# Altium PCB Glucometer-I.C.- Full V1.PcbDoc
Units mm, origin at the board's own origin, x right, y up, seen from the top; angles counter-clockwise.
Board outline 53.55 x 41.75 mm, 2 copper layers (Top Layer, Bottom Layer); 27 components, 32 nets, 132 pads, 21 vias.
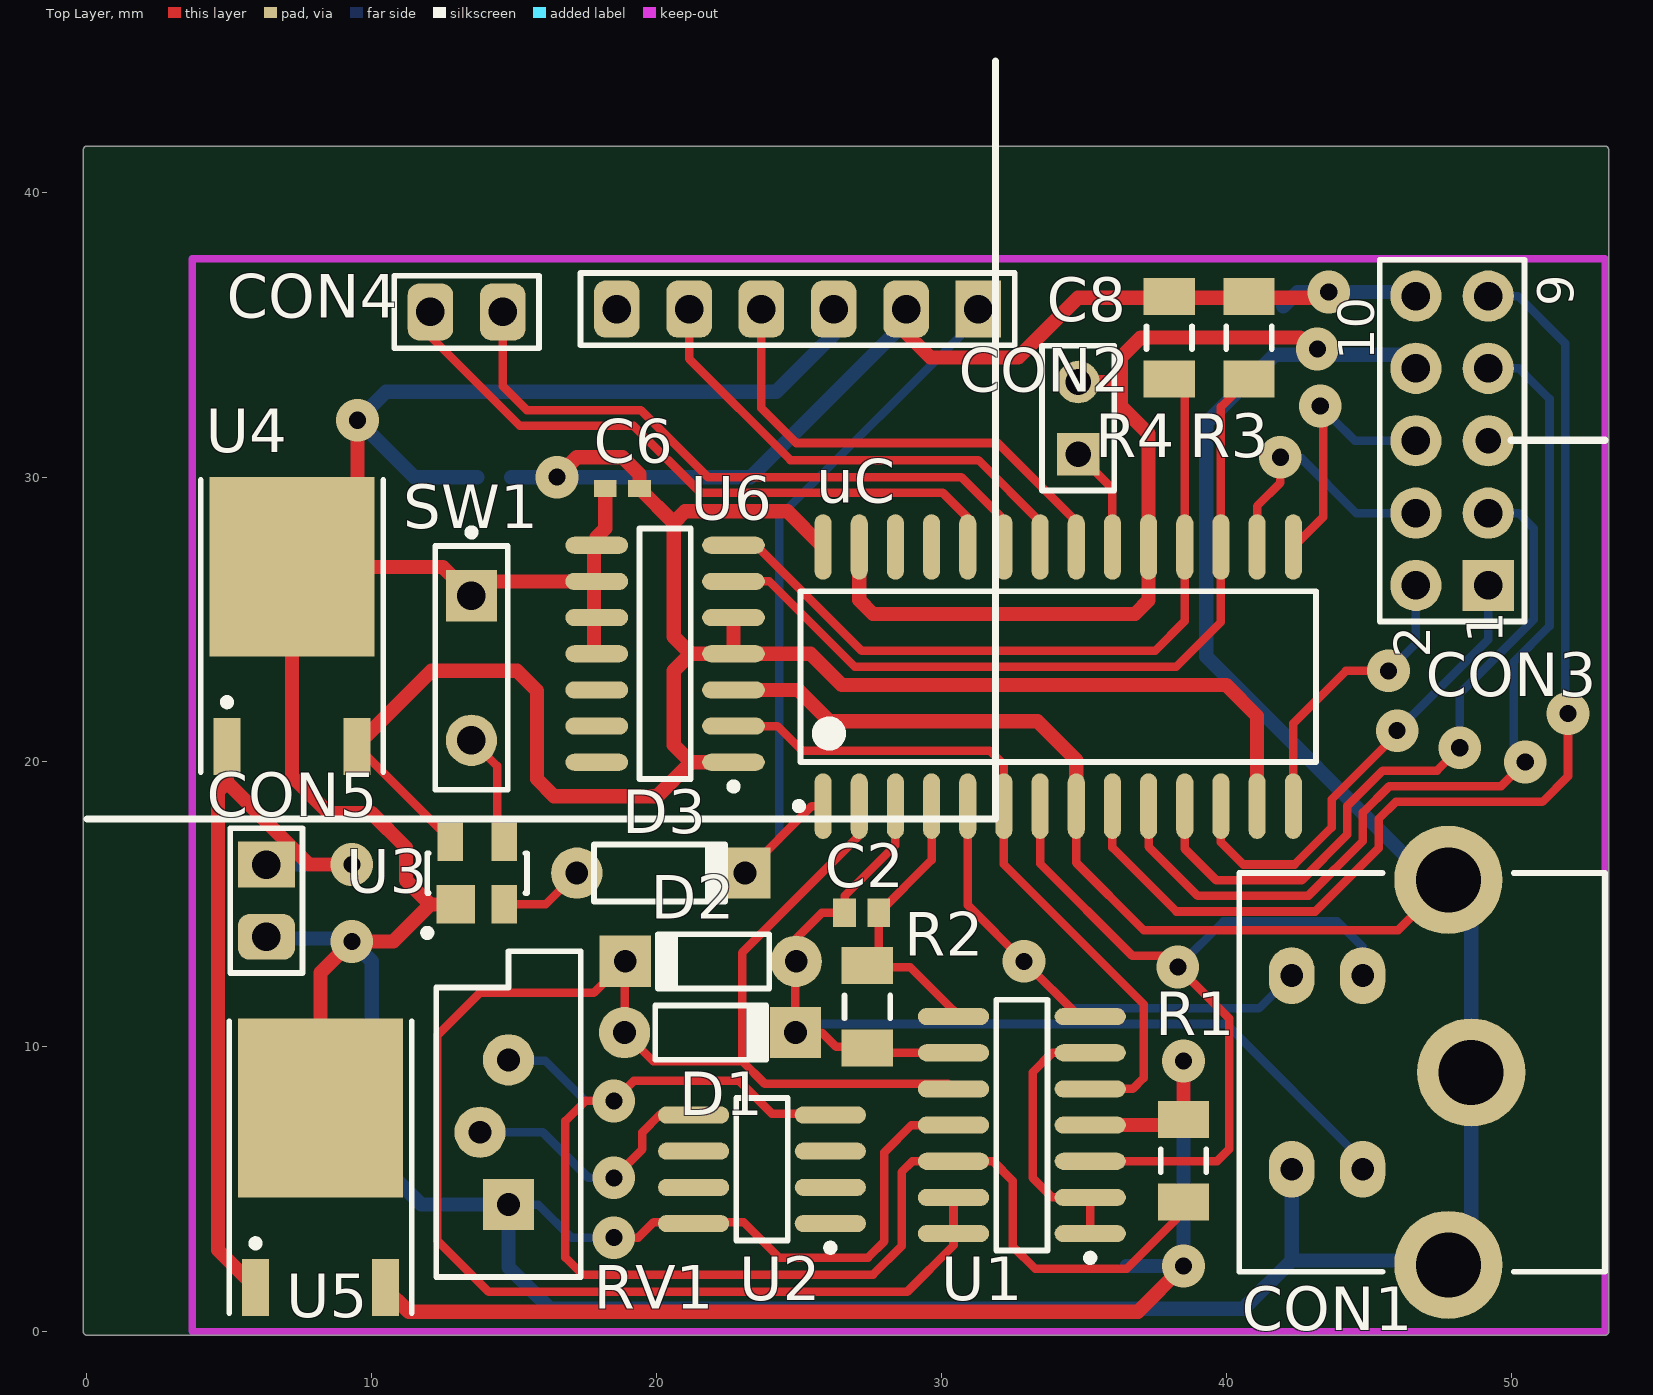
[diagram p0: Top Layer view]
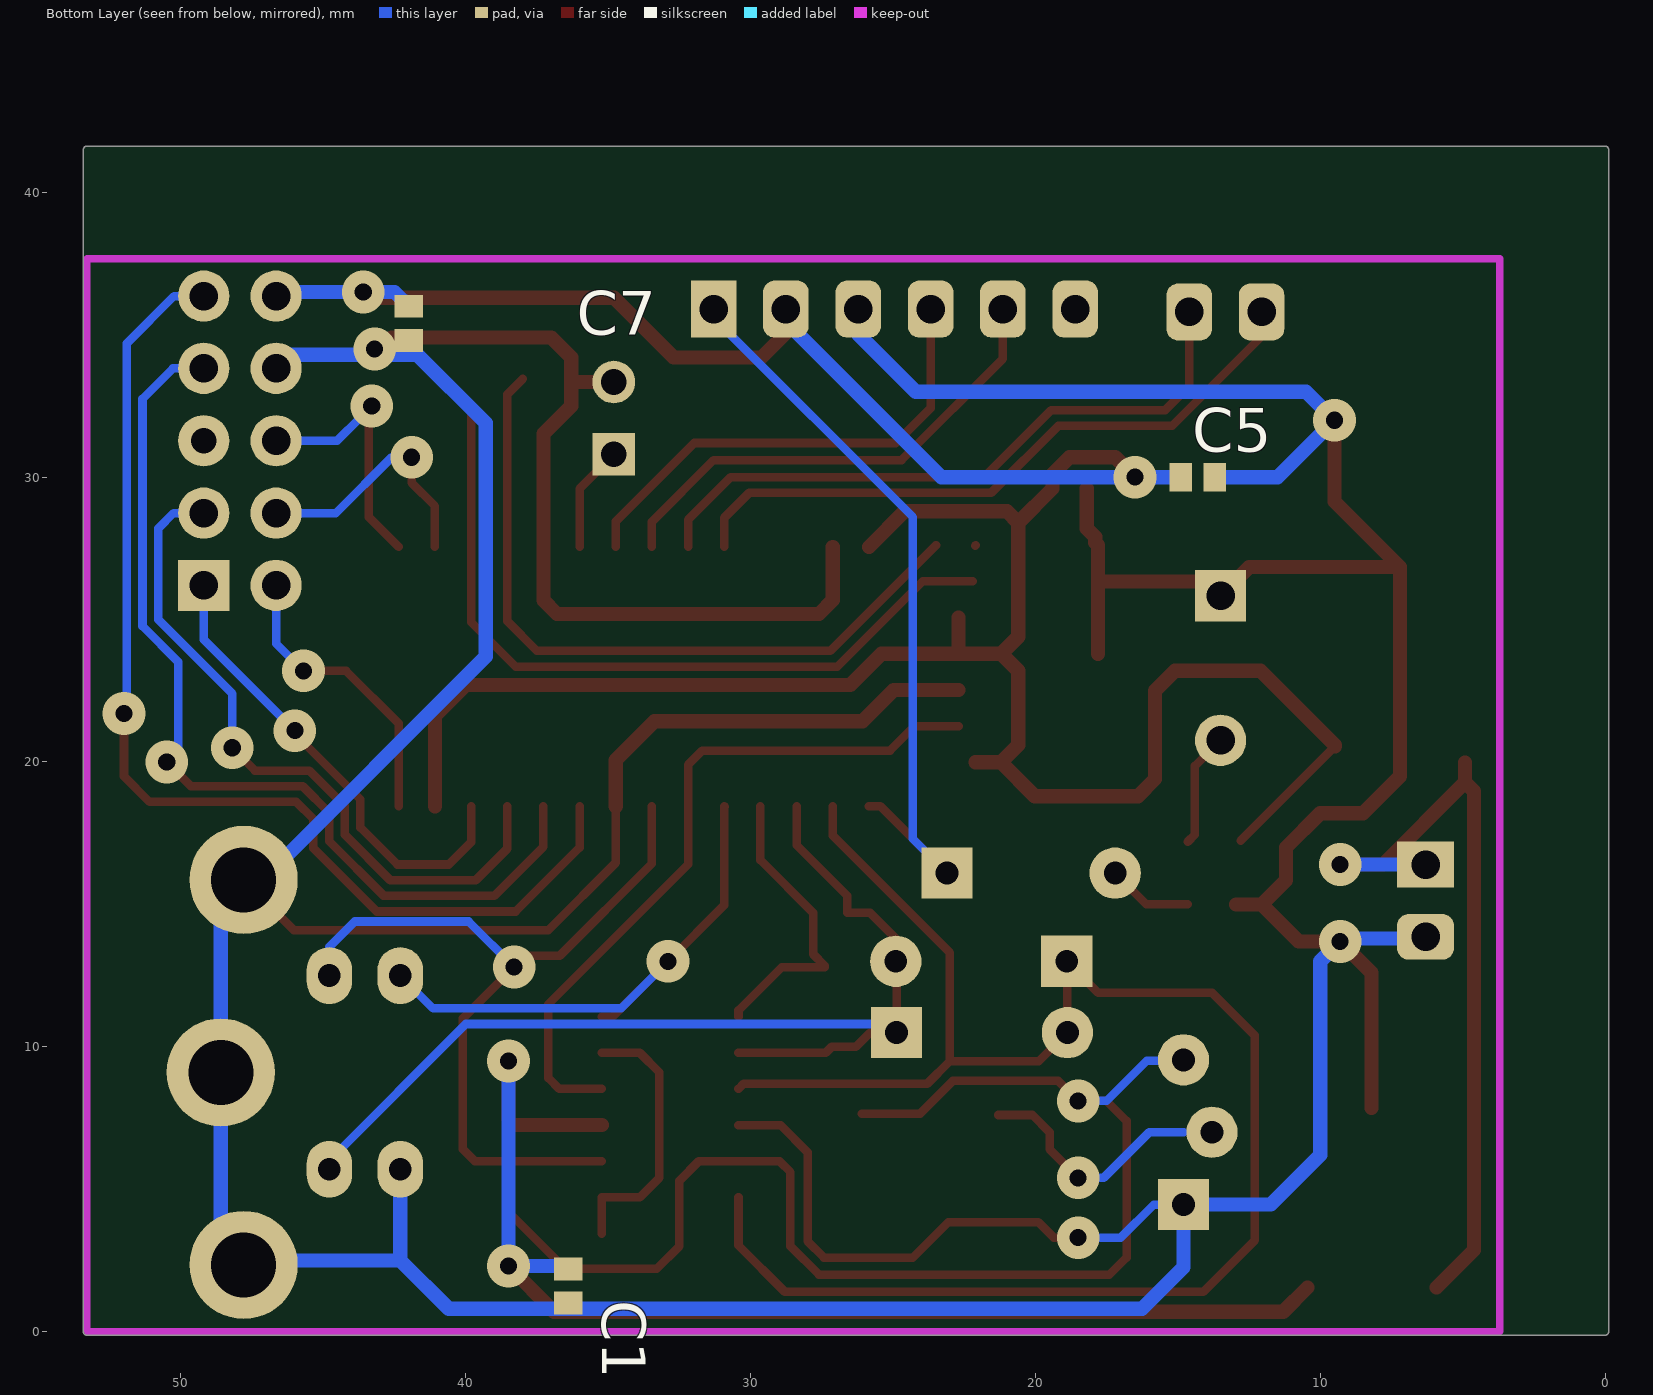
[diagram p1: Bottom Layer view, seen from below]

## Layer stack, top to bottom
Top Layer: signal copper 0.0356
Dielectric: dielectric 0.32, FR-4, Dk 4.8
Bottom Layer: signal copper 0.0356

## Board outline
-0.127,0 ccw(c0,0) 0,-0.127 53.3,-0.127 ccw(c53.3,0) 53.427,0 53.427,41.5 ccw(c53.3,41.5) 53.3,41.627 0,41.627 ccw(c0,41.5) -0.127,41.5

## Design rules (kind name [scope] priority, off if disabled: settings)
AssemblyTestPointUsage AssemblyTestPointUsage_1 [All] p2:
AssemblyTestpoint AssemblyTestpoint_1 [All] p2: testpointundercomponent=TRUE minsize=1.016 maxsize=2.54 preferedsize=1.524 minholesize=0 maxholesize=1.016 preferedholesize=0.813 testpointgrid=0.025 usegrid=TRUE gridtolerance=0 allowsidetop=TRUE allowsidebottom=TRUE
Clearance [All] p1: gap=0.25
ComponentClearance ComponentClearance_1 [All] p2: gap=0.254 collisioncheckmode=3 verticalgap=0.254 showdistances=FALSE
DiffPairsRouting DiffPairsRouting_1 [All] p2: maxlimit=0.254 minlimit=0.254 mostfreqgap=0.254 maxuncoupledlength=12.7
FabricationTestPointUsage TestPointUsage [All] p2: valid=0 allowmultiple=FALSE
FabricationTestpoint Testpoint [All] p2: side=3 testpointundercomponent=TRUE minsize=1.016 maxsize=2.54 preferedsize=1.524 minholesize=0 maxholesize=1.016 preferedholesize=0.813 testpointgrid=0.025 allowsidetop=TRUE allowsidebottom=TRUE usegrid=TRUE gridtolerance=0
FanoutControl Fanout_LCC [IsLCC] p1: bgadir=Out bgaviamode=Centered fanoutstyle=Auto fanoutdirection=Alternating viagrid=0.025 // Fanout_LCC (Default Rule)
FanoutControl Fanout_BGA [IsBGA] p2: bgadir=Out bgaviamode=Centered fanoutstyle=Auto fanoutdirection=Alternating viagrid=0.025 // Fanout_BGA (Default Rule)
FanoutControl Fanout_Default [All] p4: bgadir=Out bgaviamode=Centered fanoutstyle=Auto fanoutdirection=Alternating viagrid=0.025 // Fanout_Default (Default Rule)
FanoutControl Fanout_Small [(CompPinCount < 5)] p5: bgadir=Out bgaviamode=Centered fanoutstyle=Auto fanoutdirection=OutThenIn viagrid=0.025 // Fanout_Small (Default Rule)
FanoutControl Fanout_BGA_1 [IsBGA] p6: bgadir=Out bgaviamode=Centered fanoutstyle=Auto fanoutdirection=Alternating viagrid=0.025 // Fanout_BGA (Default Rule)
FanoutControl Fanout_LCC_1 [IsLCC] p7: bgadir=Out bgaviamode=Centered fanoutstyle=Auto fanoutdirection=Alternating viagrid=0.025 // Fanout_LCC (Default Rule)
FanoutControl Fanout_SOIC_1 [IsSOIC] p8: bgadir=Out bgaviamode=Centered fanoutstyle=Auto fanoutdirection=Alternating viagrid=0.025 // Fanout_SOIC (Default Rule)
FanoutControl Fanout_Small_1 [(CompPinCount < 5)] p9: bgadir=Out bgaviamode=Centered fanoutstyle=Auto fanoutdirection=OutThenIn viagrid=0.025 // Fanout_Small (Default Rule)
FanoutControl Fanout_Default_1 [All] p10: bgadir=Out bgaviamode=Centered fanoutstyle=Auto fanoutdirection=Alternating viagrid=0.025 // Fanout_Default (Default Rule)
Height Height_1 [All] p2: minheight=0 maxheight=25.4 prefheight=12.7
HoleSize [All] p1: absolutevalues=TRUE maxlimit=5 minlimit=0.025 maxpercent=80.000 minpercent=20.000
HoleSize HoleSize_1 [All] p2: absolutevalues=TRUE maxlimit=5 minlimit=0.025 maxpercent=80.000 minpercent=20.000
HoleToHoleClearance HoleToHoleClearance_1 [All] p2: gap=0.254 allowstackedmicrovias=TRUE
LayerPairs LayerPairs_1 [All] p2: enforce=TRUE
MinimumSolderMaskSliver MinimumSolderMaskSliver_1 [All] p2: minsoldermaskwidth=0.254
NetAntennae NetAntennae_1 [All] p2: netantennaetolerance=0
PasteMaskExpansion PasteMaskExpansion_1 [All] p2: expansion=0
PlaneClearance PlaneClearance_1 [All] p2: clearance=0.508
PolygonConnect [All] p1: connectstyle=Relief reliefconductorwidth=0.254 reliefentries=4 polygonreliefangle="90 Angle" airgapwidth=0.254
PolygonConnect PolygonConnect_1 [All] p2: connectstyle=Relief reliefconductorwidth=0.254 reliefentries=4 polygonreliefangle="90 Angle" airgapwidth=0.254
RoutingPriority RoutingPriority_1 [All] p2: routingpriority=0
RoutingTopology RoutingTopology_1 [All] p2: topology=Shortest
RoutingVias [All] p1: holewidth=0.8 width=1.5 viastyle="Through Hole" minholewidth=0.7 minwidth=1 maxholewidth=1 maxwidth=2
ShortCircuit ShortCircuit_1 [All] p2: allowed=FALSE
SilkToSilkClearance SilkToSilkClearance_1 [All] p2: silktosilkclearance=0.254
SilkToSolderMaskClearance SilkscreenOverComponentPads [IsPad] p2: minsilkscreentomaskgap=0.254 clearancetoexposedcopper=TRUE
SolderMaskExpansion [All] p1: expansion=0.102
SolderMaskExpansion SolderMaskExpansion_1 [All] p2: expansion=0.102
UnRoutedNet UnRoutedNet_1 [All] p2:
Width [All] p1: maxlimit=5 minlimit=0.25 preferedwidth=0.3 minimp=50.000000 maximp=50.000000 favimp=50.000000
23 further rules are at their usual default settings.

## Components (designator, comment, footprint, x,y, rotation, side; value= is the part's Value field where it differs from the comment)
C1 "Cap2" CAPC1005N#1 36.4,1.6 r270 bottom
C2 "Cap2" CAPC1005N#1 27.2,14.7 r0 top
C5 "Cap" CAPC1005N#1 14.3,30 r0 bottom
C6 "Cap" CAPC1005N#2 18.8,29.6 r0 top
C7 "Cap" CAPC1005N#1 42,35.4 r90 bottom
C8 "Cap Pol1" HDR1X2#1 34.8,30.8 r90 top
CON1 "" CDIN2.6-3H4A 53.3,9.1 r180 top
CON2 "Header 6" HDR1X6 31.3,35.9 r180 top
CON3 "Header 5X2" HDR2X5 49.2,26.2 r90 top
CON4 "Header 2" HDR1X2#2 14.6,35.8 r180 top
CON5 "Header 2" HDR1X2#3 6.3,16.4 r270 top
D1 "1N4148" DO-35#1 21.9,10.5 r0 top
D2 "1N4148" DO-35#2 22,13 r180 top
D3 "1N4148" DO-35#3 20.1,16.1 r0 top
R1 "Res1" RESC3216N 38.5,6 r90 top
R2 "Res1" RESC3216N 27.4,11.4 r270 top
R3 "Res1" RESC3216N 40.8,34.9 r270 top
R4 "Res1" RESC3216N 38,34.9 r270 top
RV1 "RPot" VR5 14.8,7 r90 top
SW1 "SW-PB" SPST-2 13.5,23.3 r270 top
U1 "LMC6044IN" M14A_N 32.825,7.25 r180 top
U2 "LM385BM" M08A_N 23.7,5.7 r180 top
U3 "SMT811TW16F" SOT143 13.7,16.1 r0 top
U4 "µA78M33CKVURG3" KTP02 7.2,23.7 r0 top
U5 "µA78M05CKTPR" KTP02 8.2,4.7 r0 top
U6 "AD5241" R-14_N 20.3,23.8 r180 top
uC "PIC24FJ64GA102-I/SO" SOIC-SO28_N 34.1,23 r90 top

## Footprints (in the part's own frame and the unit in brackets; to place one, negate y for a bottom-side part, rotate by r counter-clockwise, add the part's x,y. Pads: shape width x height; smd on the part's side, far side on the other; paste and mask are expansions set on the pad)
CAPC1005N#1 [mm] "Chip Capacitor, Body 1.0x0.5mm, IPC Medium Density"
  rect 0.8x1 smd: 1(-0.6,0) 2(0.6,0)
  body extent -0.55,-0.3 0.55,0.3, height 0.6
CAPC1005N#2 [mm] "Chip Capacitor, Body 1.0x0.5mm, IPC Medium Density"
  rect 0.8x0.6 smd: 1(-0.6,0) 2(0.6,0)
  body extent -0.55,-0.3 0.55,0.3, height 0.6
CDIN2.6-3H4A [mm] "Connector; Circular DIN, Thru-Hole; 4 Position; Right Angle; Pitch 2.1/2.6 mm; Body 14 x 12.84 x 13 mm (WxTxH), Shielded, Special PCB Retention"
  oval 1.6x2 hole 0.8: 1(8.51,-3.4) 2(8.51,3.4) 3(11,-3.4) 4(11,3.4)
  round 3.8 hole 2.28: MH1(5.5,-6.76) MH2(4.7,0) MH3(5.5,6.76)
  silkscreen extent 0,-7 12.84,7, body extent 0,-7 12.84,7, height 13
DO-35#1 [mm] "Diode, Axial; Body 3.8 x 1.9 mm (LxDia. max), Lead Dia. 0.53 mm (max)"
  round 1.8 hole 0.8: 1(-3.025,0)
  rect 1.8x1.8 hole 0.8: 2(2.975,0)
  silkscreen extent -1.95,-0.95 2.05,0.95
DO-35#2 [mm] "Diode, Axial; Body 3.8 x 1.9 mm (LxDia. max), Lead Dia. 0.53 mm (max)"
  round 1.8 hole 0.8: 1(-2.9,0)
  rect 1.8x1.8 hole 0.8: 2(3.1,0)
  silkscreen extent -1.95,-0.95 2.05,0.95
DO-35#3 [mm] "Diode, Axial; Body 4.6 x 2 mm (LxDia. max), Lead Dia. 0.53 mm (max)"
  round 1.8 hole 0.8: 1(-2.9,0)
  rect 1.8x1.8 hole 0.8: 2(3,0)
  silkscreen extent -2.3,-1 2.4,1
HDR1X2#1 [mm] "Connector; Header; 2 Position"
  rect 1.5x1.5 hole 0.9: 1(0,0)
  round 1.5 hole 0.9: 2(2.54,0)
  silkscreen extent -1.27,-1.27 3.81,1.27
HDR1X2#2 [mm] "Connector; Header; 2 Position"
  rrect50% 1.6x2 hole 1: 1(0,0) 2(2.54,0)
  silkscreen extent -1.27,-1.27 3.81,1.27
HDR1X2#3 [mm] "Connector; Header; 2 Position"
  rect 1.6x2 hole 1: 1(0,0)
  rrect50% 1.6x2 hole 1: 2(2.54,0)
  silkscreen extent -1.27,-1.27 3.81,1.27
HDR1X6 [mm] "Connector; Header; 6 Position"
  rect 1.6x2 hole 1: 1(0,0)
  rrect50% 1.6x2 hole 1: 2(2.54,0) 3(5.08,0) 4(7.62,0) 5(10.16,0) 6(12.7,0)
  silkscreen extent -1.27,-1.27 13.97,1.27
HDR2X5 [mm] "Connector; Header; 5x2 Position"
  rect 1.8x1.8 hole 1: 1(0,0)
  round 1.8 hole 1: 2(0,2.54) 3(2.54,0) 4(2.54,2.54) 6(5.08,2.54) 7(7.62,0) 8(7.62,2.54) 9(10.16,0) 10(10.16,2.54)
  round 1.8 hole 0.9: 5(5.08,0)
  silkscreen extent -1.27,-1.27 11.43,3.81
KTP02 [mm] "PowerFLEX (D-PAK/TO-252-AA); 3 Leads (1 Cropped); Body 9.7 (inc. leads) x 6.2 mm (LxW max)"
  rect 0.95x2 smd: 1(-2.285,-3.15) 3(2.285,-3.15)
  rect 5.8x6.3 smd: 4(0,3.15)
  silkscreen extent -3.2,-4.05 3.2,6.2
M08A_N [mm] "SOIC, 8-Leads, Body 4.9x3.9mm, Pitch 1.27mm, IPC Medium Density"
  oval 2.5x0.6 smd: 1(-2.4,1.905) 2(-2.4,0.635) 3(-2.4,-0.635) 4(-2.4,-1.905) 5(2.4,-1.905) 6(2.4,-0.635) 7(2.4,0.635) 8(2.4,1.905)
  silkscreen extent -2.53,-2.5 0.9,2.88, body extent -2,-2.5 2,2.5, height 1.75
M14A_N [mm] "SOIC, 14-Leads, Body 8.6x3.9mm, Pitch 1.27mm, IPC Medium Density"
  oval 2.5x0.6 smd: 1(-2.4,3.81) 2(-2.4,2.54) 3(-2.4,1.27) 4(-2.4,0) 5(-2.4,-1.27) 6(-2.4,-2.54) 7(-2.4,-3.81) 8(2.4,-3.81) 9(2.4,-2.54) 10(2.4,-1.27) 11(2.4,0) 12(2.4,1.27) 13(2.4,2.54) 14(2.4,3.81)
  silkscreen extent -2.53,-4.4 0.9,4.78, body extent -2,-4.38 2,4.38, height 1.75
R-14_N [mm] "14-Pin Narrow Body Small Outline Integrated Circuit 1.27 mm Pitch, IPC Medium Density"
  oval 2.2x0.6 smd: 1(-2.4,3.81) 2(-2.4,2.54) 3(-2.4,1.27) 4(-2.4,0) 5(-2.4,-1.27) 6(-2.4,-2.54) 7(-2.4,-3.81) 8(2.4,-3.81) 9(2.4,-2.54) 10(2.4,-1.27) 11(2.4,0) 12(2.4,1.27) 13(2.4,2.54) 14(2.4,3.81)
  silkscreen extent -2.53,-4.4 0.9,4.78, body extent -1.95,-4.33 1.95,4.33, height 1.75
RESC3216N [mm] "Chip Resistor, Body 3.2x1.6mm, IPC Medium Density"
  rect 1.3x1.8 smd: 1(-1.45,0) 2(1.45,0)
  silkscreen extent -0.4,-0.8 0.4,0.8, body extent -1.68,-0.87 1.68,0.87, height 0.71
SOIC-SO28_N [mm] "SOIC, 28-Leads, Body 17.9x7.5mm, Pitch 1.27mm, IPC Medium Density"
  oval 2.3x0.6 smd: 1(-4.55,8.255) 2(-4.55,6.985) 3(-4.55,5.715) 4(-4.55,4.445) 5(-4.55,3.175) 6(-4.55,1.905) 7(-4.55,0.635) 8(-4.55,-0.635) 9(-4.55,-1.905) 10(-4.55,-3.175) 11(-4.55,-4.445) 12(-4.55,-5.715) 13(-4.55,-6.985) 14(-4.55,-8.255) 15(4.55,-8.255) 16(4.55,-6.985) 17(4.55,-5.715) 18(4.55,-4.445) 19(4.55,-3.175) 20(4.55,-1.905) 21(4.55,-0.635) 22(4.55,0.635) 23(4.55,1.905) 24(4.55,3.175) 25(4.55,4.445) 26(4.55,5.715) 27(4.55,6.985) 28(4.55,8.255)
  silkscreen extent -4.67,-9.05 3,9.23, body extent -3.8,-9.06 3.8,9.06, height 2.65
SOT143 [mm] "SOT-143; 4 Leads; Body 3 x 2.6 mm, inc. leads (LxW max)"
  rect 1.35x1.35 smd: 1(-0.75,-1.1)
  rect 0.9x1.35 smd: 2(0.95,-1.1) 3(0.95,1.1) 4(-0.95,1.1)
  silkscreen extent -1.87,-2.22 1.75,0.7
SPST-2 [mm] "Switch; 2 Leads"
  rect 1.8x1.8 hole 1: 1(-2.54,0)
  round 1.8 hole 1: 2(2.54,0)
  silkscreen extent -4.89,-1.27 4.28,1.27
VR5 [mm] "Thru-Hole; 3 Leads"
  rect 1.8x1.8 hole 0.8: 1(-2.54,0)
  round 1.8 hole 0.8: 2(0,1) 3(2.54,0)
  silkscreen extent -5.08,-2.54 6.35,2.54

## Part data
C1 C2 C5 C6 C7: "Capacitor"
C8: "Polarized Capacitor (Radial)"
CON1: library part "MiniDin 4Pins - SuperVideo", "MiniDin 4 Pins"
CON2: "Header, 6-Pin"
CON3: "Header, 5-Pin, Dual row"
CON4 CON5: "Header, 2-Pin"
D1 D2 D3: "High Conductance Fast Diode"
R1 R2 R3 R4: "Resistor"
RV1: "Potentiometer"
SW1: "Switch"
U1: "CMOS Quad Micropower Operational Amplifier, 14-pin MDIP"
U2: "Adjustable Micropower Voltage Reference, 8-pin Narrow SOIC"
U3: "Reset Circuit, 3.08V, Push Pull Inverted RST"
U4 U5: "Positive-Voltage Regulator"
U6: "AD5241BR"
uC: "General purpose 16-bit Flash Microcontroller with nanoWatt XLP, 64KB Flash, 8KB SRAM, 28-Pin SOIC, Industrial Temperature"

## Via types
v1: diameter 1.5, hole 0.6, Top Layer to Bottom Layer, 21 vias

## Nets (pads, with @x,y where several pads share a name; then routed paths per layer and width w, separated by ;. In a path a pad name is that pad's centre, name@x,y a point inside that pad or via, vN(x,y) a via of type N, cw(c..) or ccw(c..) an arc to the next point about the centre after c; other vN are vias at no path point)
3.3V: C5.2 C6.2 C7.2 CON2.2 CON3.10 R3.1 R4.1 U3.4 U4.3 U6.1 U6.4 U6.5 uC.13 uC.28 | length 107
  Top Layer w0.3: U4.3 U3.4@12.793,17.243
  Top Layer w0.5: U4.3 9.485,20.585 12.1,23.2 15.1,23.2 15.8,22.5 15.8,19.4 16.4,18.8 20.02,18.8 21.21,19.99 ; v1(16.5,30) 17.2,30.7 18.8,30.7 19.4,30.1 C6.2 20.6,28.4 ; U6.1@22.1,19.99 21.21,19.99 ; U6.5 U6.4 ; uC.28 24.595,28.8 21,28.8 20.6,28.4 ; CON2.2 28.76,35.06 29.62,34.2 32.7,34.2 34.8,36.3 43,36.3 v1@43.5,36.8 ; uC.13 41.085,21.615 40,22.7 26.5,22.7 25.4,23.8 U6.4 ; 20.6,28.4 20.6,24.4 21.2,23.8 ; 21.2,23.8 20.6,23.2 20.6,20.6 21.21,19.99 ; 21.2,23.8 U6.4
  Bottom Layer w0.5: C5.2 v1(16.5,30) 23.3,30 28.76,35.46 CON2.2 ; C7.2 42.5,36.5 v1(43.6,36.5) 46.52,36.5 CON3.10
5V: C1.1 R1.2 U1.4 U5.3 | length 43.4
  Top Layer w0.5: U5.3@10.45,1.55 11.3,0.7 36.9,0.7 v1(38.5,2.3) ; U1.4 R1.2@38.3,7.25 ; R1.2 v1(38.5,9.5)
  Bottom Layer w0.5: C1.1@36.5,2.3 v1(38.5,2.3) v1(38.5,9.5)
GND: C1.2 C5.1 C6.1 C7.1 C8.2 CON1.4 CON1.MH1 CON1.MH2 CON1.MH3 CON2.3 CON3.8 CON5.2 RV1.1 SW1.1 U1.11 U2.8 U3.1 U4.4 U5.4 U6.3 U6.8 U6.9 U6.10 U6.11 uC.8 uC.19 uC.27 | length 253.7
  Top Layer w0.3: v1(18.5,3.3) 19.355,3.3 19.9,3.845 23.055,3.845 24.3,2.6 27.425,2.6 28,3.175 28,6.3 28.95,7.25 U1.11 ; uC.8@34.735,18.7 34.735,16.465 37.1,14.1 46.04,14.1 CON1.MH1
  Top Layer w0.5: U5.4 8.2,12.6 v1@9.2,13.6 ; v1(9.3,13.7) 10.75,13.7 12.05,15 ; v1(9.5,32) 9.5,29.15 U4.4 ; U3.1 12.05,15 ; U6.11@17.8,23.8 U6.9@17.8,26.34 ; C6.1 18.2,28.2 17.9,27.9 17.9,27.71 17.8,27.61 U6.9@17.8,26.34 ; U6.3 24.97,22.53 26.07,21.43 33.37,21.43 34.735,20.065 uC.8 ; uC.27 27.115,25.685 27.6,25.2 36.8,25.2 37.275,25.675 uC.19 37.275,31.525 36.3,32.5 36.3,33.33 ; C8.2 36.29,33.34 36.3,33.35 36.3,34.2 37,34.9 42.6,34.9 v1@43.2,34.3 ; U4.4 7.2,19.5 8.5,18.2 10,18.2 11.2,17 11.2,15.85 12.05,15 ; U4.4 12.49,26.85 SW1.1 14,26.34 U6.9@17.8,26.34
  Bottom Layer w0.3: RV1.1 15.84,4.46 17,3.3 v1(18.5,3.3)
  Bottom Layer w0.5: CON5.2@6.24,13.8 9.2,13.8 v1(9.3,13.7) 10,13 10,6.2 11.74,4.46 RV1.1 14.8,2.26 16.26,0.8 40.6,0.8 42.3,2.5 ; C5.1 11.5,30 v1(9.5,32) 10.5,33 24.2,33 26.22,35.02 CON2.3 ; CON1.4 42.3,2.5 ; CON3.8 46.18,34.3 41.7,34.3 39.3,31.9 39.3,23.7 47.14,15.86 CON1.MH1 48.6,15.06 CON1.MH2 48.6,3.14 CON1.MH3 47.64,2.5 42.3,2.5
  other v1: 43.2,34.5
NetC2_1: C2.1 CON1.2 D1.2 D2.1 R2.2 U1.9 uC.3 | length 38
  Top Layer w0.3: uC.3 28.385,17.085 26.6,15.3 C2.1 25.8,14.7 24.9,13.8 D2.1 24.875,12.975 D1.2 25.8,10.5 26.3,10 27.15,10 27.36,9.79 U1.9
  Bottom Layer w0.3: D1.2 25.175,10.8 40,10.8 44.79,6.01 CON1.2
NetC2_2: C2.2 R2.1 U1.8 uC.4 | length 10.4
  Top Layer w0.3: R2.1@27.4,12.8 28.9,12.8 30.425,11.275 U1.8 ; R2.1 27.8,13.25 C2.2 29.655,16.555 uC.4
NetC8_1: C8.1 uC.20 | length 3.7
  Top Layer w0.3: C8.1 36.005,29.595 uC.20
NetCON1_1: CON1.1 U1.3 uC.7 | length 29.1
  Top Layer w0.3: uC.7 33.465,16.435 36.7,13.2 37.9,13.2 v1(38.3,12.8) 40.1,11 40.1,6.4 39.68,5.98 U1.3
  Bottom Layer w0.3: v1(38.3,12.8) 39.9,14.4 43.9,14.4 44.79,13.51 CON1.1
NetCON1_3: CON1.3 U1.7 uC.5 | length 20
  Top Layer w0.3: uC.5@30.9,18.425 uC.5 30.925,14.975 v1(32.9,13) 34.84,11.06 U1.7
  Bottom Layer w0.3: v1(32.9,13) 34.55,11.35 41.15,11.35 CON1.3
NetCON2_1: CON2.1 D3.2 uC.1 | length 26.9
  Top Layer w0.3: v1(23.1,16.1) 25.45,18.45 uC.1
  Bottom Layer w0.3: v1(23.1,16.1) 24.3,17.3 24.3,28.6 31.3,35.6 CON2.1
NetCON2_4: CON2.4 uC.21 | length 17.1
  Top Layer w0.3: CON2.4 23.68,32.42 24.9,31.2 31.981,31.2 34.735,28.446 uC.21
NetCON2_5: CON2.5 uC.22 | length 17.3
  Top Layer w0.3: CON2.5 21.14,34.16 24.7,30.6 31.3,30.6 33.465,28.435 uC.22
NetCON3_1: CON3.1 uC.12 | length 16.7
  Top Layer w0.3: uC.12 39.815,17.185 40.6,16.4 42.4,16.4 43.7,17.7 43.7,18.683 v1@46,20.983
  Bottom Layer w0.3: v1(46,21.1) 49.2,24.3 CON3.1
NetCON3_2: CON3.2 uC.14 | length 10.4
  Top Layer w0.3: uC.14 42.355,21.355 44.2,23.2 v1(45.7,23.2)
  Bottom Layer w0.3: v1(45.7,23.2) 46.66,24.16 CON3.2
NetCON3_3: CON3.3 uC.11 | length 24.7
  Top Layer w0.3: uC.11 38.545,16.955 39.65,15.85 41,15.85 42.65,15.85 44.25,17.45 44.25,18.456 45.494,19.7 47.4,19.7 v1(48.2,20.5)
  Bottom Layer w0.3: v1(48.2,20.5) 48.2,22.4 50.8,25 50.8,28.2 50.26,28.74 CON3.3
NetCON3_4: CON3.4 uC.16 | length 9.7
  Top Layer w0.3: uC.16 41.085,28.985 41.9,29.8 v1(41.9,30.7) ; CON3.4@46.04,28.74 CON3.4
  Bottom Layer w0.3: v1(41.9,30.7) 42.6,30.7 44.56,28.74 CON3.4
NetCON3_6: CON3.6 uC.15 | length 8.9
  Top Layer w0.3: uC.15 43.4,28.595 43.4,31.9 v1@43.2,32.1
  Bottom Layer w0.3: v1@43.2,32.1 43.7,32.1 44.52,31.28 CON3.6
  other v1: 43.3,32.5
NetCON3_7: CON3.7 uC.10 | length 33.9
  Top Layer w0.3: uC.10 37.275,17.025 39,15.3 42.9,15.3 42.9,15.322 44.8,17.222 44.8,18.228 45.722,19.15 49.65,19.15 v1(50.5,20)
  Bottom Layer w0.3: CON3.7 50.28,33.82 51.35,32.75 51.35,24.772 50.1,23.522 50.1,20.4 v1(50.5,20)
NetCON3_9: CON3.9 uC.9 | length 39.6
  Top Layer w0.3: uC.9 36.005,16.995 38.25,14.75 43.128,14.75 45.35,16.972 45.35,18 45.95,18.6 51.1,18.6 52,19.5 v1(52,21.7)
  Bottom Layer w0.3: CON3.9 50.24,36.36 51.9,34.7 51.9,21.8 v1(52,21.7)
NetCON4_1: CON4.1 uC.23 | length 23.1
  Top Layer w0.3: CON4.1 14.6,33.2 15.45,32.35 19.45,32.35 21.8,30 30.7,30 32.195,28.505 uC.23
NetCON4_2: CON4.2 uC.24 | length 23.4
  Top Layer w0.3: CON4.2 12.06,34.94 15.2,31.8 19.2,31.8 21.55,29.45 30.05,29.45 30.925,28.575 uC.24
NetD3_1: D3.1 U3.2 | length 3
  Top Layer w0.3: U3.2 16.1,15 D3.1
NetR1_1: R1.1 RV1.3 U1.12 U2.4 | length 48.7
  Top Layer w0.3: U2.4@26.1,7.655 24.045,7.655 22.9,8.8 19.2,8.8 v1(18.5,8.1) 17.5,8.1 16.8,7.4 16.8,2.6 17.4,2 27.603,2 28.6,2.997 28.6,5.6 28.98,5.98 U1.12 31.82,5.98 32.5,5.3 32.5,3 33.3,2.2 36.5,2.2 38.5,4.2 R1.1
  Bottom Layer w0.3: RV1.3@14.8,9.515 16.085,9.515 17.5,8.1 v1(18.5,8.1)
NetR3_2: R3.2 U6.6 uC.17 | length 28.4
  Top Layer w0.3: U6.6@22.2,26.34 23.96,26.34 26.95,23.35 38.25,23.35 39.8,24.9 39.8,27.535 uC.17 39.815,32.465 R3.2
NetR4_2: R4.2 U6.7 uC.18 | length 25.8
  Top Layer w0.3: U6.7@22.1,27.61 U6.7@22.11,27.6 ; U6.7@23.49,27.61 27.2,23.9 37.5,23.9 38.545,24.945 uC.18 38.545,32.905 R4.2
NetRV1_3: RV1.2 U2.5 | length 8.4
  Top Layer w0.3: v1(18.5,5.4) 19.5,6.4 19.5,7 20.105,7.605 U2.5
  Bottom Layer w0.3: 14.8,7 16,7 17.6,5.4 v1(18.5,5.4)
NetSW1_2: SW1.2 U3.3 | length 4
  Top Layer w0.3: SW1.2 14.4,19.86 14.4,17.45 U3.3
NetU1_1: U1.1 U1.2 U1.6 | length 9.6
  Top Layer w0.3: U1.1 U1.2 33.89,4.71 33.2,5.4 33.2,9.1 33.89,9.79 U1.6
NetU1_5: U1.5 U6.2 uC.6 | length 25.1
  Top Layer w0.3: U6.2 24.24,21.26 25.1,20.4 31.7,20.4 32.195,19.905 uC.6 32.195,16.405 37.1,11.5 37.1,8.9 36.72,8.52 U1.5
NetuC_25: uC.25
NetuC_26: uC.26
VDD: CON5.1 U4.1 U5.1 | length 27.7
  Top Layer w0.5: U4.1@4.915,19.985 4.915,19.285 ; U5.1 4.6,2.865 4.6,18.97 4.915,19.285 ; v1(9.3,16.4) 7.8,16.4 4.915,19.285
  Bottom Layer w0.5: CON5.1 v1(9.3,16.4)
VGND: D1.1 D2.2 U1.10 U1.13 U1.14 uC.2 | length 61.6
  Top Layer w0.3: uC.2 27.115,17.415 23,13.3 23,9.5 ; U1.13 U1.14 30.425,3.025 28.8,1.4 14.1,1.4 12.3,3.2 12.3,10.4 13.8,11.9 17.8,11.9 18.875,12.975 D1.1 19.875,9.5 23,9.5 ; U1.10 30.245,8.7 23.8,8.7 23,9.5
pads on no net: CON2.6 CON3.5 U2.1 U2.2 U2.3 U2.6 U2.7 U6.12 U6.13 U6.14

## Keep-outs
Keep-Out Layer:
  lines w0.254: 3.7,0 3.7,37.67 53.3,37.67 53.3,0 3.7,0

## Silkscreen, mask and mechanical layers (free items; w line width, h text height)
Top Overlay:
  lines w0.254: 0,18 31.9,18 31.9,44.6 ; 50,31.3 53.3,31.3
Mechanical 16:
  lines w0.127: -123.675,-31.275 -118.595,-31.275 ; -123.675,22.7 -118.595,22.7 ; -123.675,76.675 -118.595,76.675 ; -53.825,-85.25 -53.825,-80.17 ; -53.825,125.57 -53.825,130.65 ; 16.025,-85.25 16.025,-80.17 ; 16.025,125.57 16.025,130.65 ; 85.875,-85.25 85.875,-80.17 ; 85.875,125.57 85.875,130.65 ; 150.645,-31.275 155.725,-31.275 ; 150.645,22.7 155.725,22.7 ; 150.645,76.675 155.725,76.675 ; -123.675,-85.25 155.725,-85.25 155.725,130.65 -123.675,130.65 -123.675,-85.25 ; -118.595,-80.17 -118.595,125.57 150.645,125.57 150.645,-80.17 -118.595,-80.17
  text "1" at -89.351,127.221 h1.78
  text "2" at -19.484,127.221 h1.78
  text "3" at 50.239,127.221 h1.78
  text "4" at 120.114,127.221 h1.78
  text "A" at -121.77,101.364 h1.78
  text "A" at 152.55,101.364 h1.78
  text "B" at 152.925,50.05 h1.78
  text "B" at -121.77,47.389 h1.78
  text "C" at -121.77,-6.586 h1.78
  text "C" at 152.55,-6.586 h1.78
  text "D" at -121.77,-60.434 h1.78
  text "D" at 152.55,-60.434 h1.78
  text "1" at -89.351,-83.599 h1.78
  text "2" at -19.484,-83.599 h1.78
  text "3" at 50.239,-83.599 h1.78
  text "4" at 120.114,-83.599 h1.78

## Dimensions
3.7,37.67 to 53.3,37.67 on Keep-Out Layer
3.7,37.67 to 3.7,0 on Keep-Out Layer

## Text inside footprints (layer, text, board x,y; h text height)
CON1: Mechanical 1 "PCB Edge" at 52.7,15.8 h0.25 r270
CON3: Top Overlay "2" at 47.168,23.66 h1.27 r90; Top Overlay "1" at 49.708,24.168 h1.27 r90; Top Overlay "9" at 52.2,36 h1.27 r90; Top Overlay "10" at 45.2,34.1 h1.27 r90